# Altium PCB PCB.PcbDoc (part 2 of 2)
Units mm, origin at the board's own origin, x right, y up, seen from the top; angles counter-clockwise.
Board outline 51.3 x 20.05 mm, 4 copper layers (Top Layer, Power Layer, GND Layer, Bottom Layer), stack 1.536 mm thick; 81 components, 59 nets, 315 pads, 114 vias.
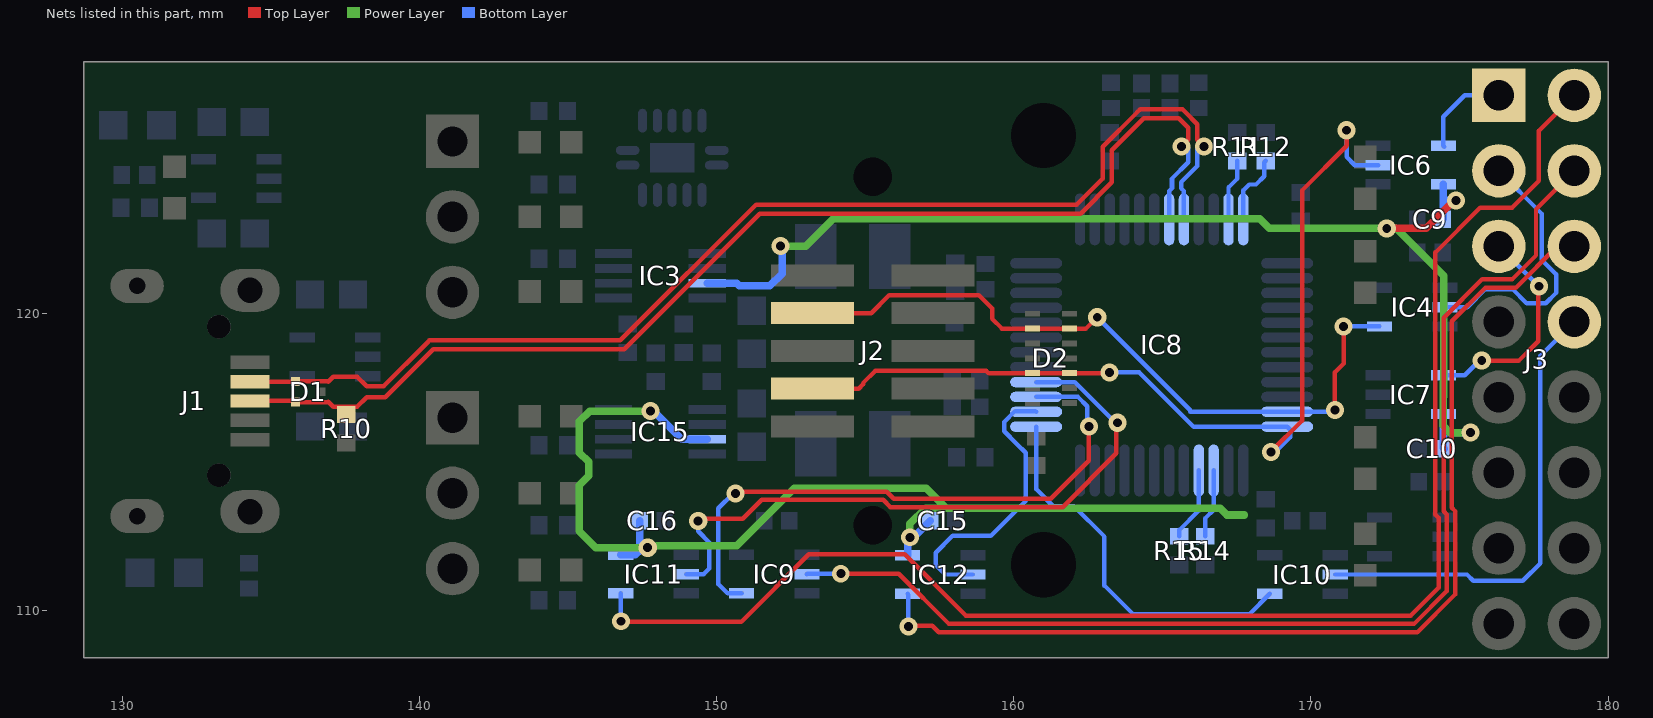
[diagram p4: the nets of this part, all layers, seen from the top]

## Via types
v1: diameter 0.61, hole 0.3, Top Layer to Bottom Layer, tented both sides, 100 vias
v2: diameter 0.61, hole 0.3, Top Layer to Bottom Layer, 11 vias
v3: diameter 0.6, hole 0.3, Top Layer to Bottom Layer, tented both sides, 3 vias

## Nets (pads, with @x,y where several pads share a name; then routed paths per layer and width w, separated by ;. In a path a pad name is that pad's centre, name@x,y a point inside that pad or via, vN(x,y) a via of type N, cw(c..) or ccw(c..) an arc to the next point about the centre after c; other vN are vias at no path point) (continued)
UART_1_RTS_T: IC7.4 J3.5 | length 7.3
  Top Layer w0.15: v1(175.75,118.425) 177,118.425 177.65,119.075 177.65,120.9 v1(177.675,120.925)
  Bottom Layer w0.15: IC7.4@174.458,117.925 175.175,117.925 v1@175.6,118.35 ; J3.5@176.325,122.27 177.67,120.925 v1(177.675,120.925)
UART_1_RXD: D2.9 IC4.4 IC8.23 J2.8 | length 24.4
  Top Layer w0.15: J2.8@153.218,120.02 155.195,120.02 155.8,120.625 158.825,120.625 159.273,120.177 159.273,119.825 159.598,119.5 D2.9@160.625,119.5 162.427,119.5 v1(162.808,119.881) ; v1(170.808,116.756) 170.808,116.683 170.8,116.675 170.8,118.025 171.1,118.325 v1(171.1,119.575)
  Bottom Layer w0.15: v1(162.808,119.881) 165.942,116.747 165.942,116.7 IC8.23@169.2,116.7 170.75,116.7 170.775,116.675 170.8,116.675 170.808,116.683 v1(170.808,116.756) ; v1(171.1,119.575) 172.304,119.575 IC4.4@172.308,119.571
UART_1_RXD_T: IC4.2 J3.3 | length 9.2
  Bottom Layer w0.15: IC4.2@174.508,120.221 175.258,120.221 175.869,120.832 176.781,120.832 177.257,120.357 177.907,120.357 178.25,120.7 178.25,121.327 177.763,121.814 177.763,123.372 J3.3@176.325,124.81
UART_1_RXLED: IC8.12 R12.1 | length 2.4
  Bottom Layer w0.15: IC8.12@167.725,123.175 167.725,124.15 167.925,124.35 168.15,124.35 168.425,124.625 168.425,125.095 R12.1@168.475,125.145
UART_1_TXD: D2.12 IC6.2 IC8.24 J2.4 | length 32.2
  Top Layer w0.15: J2.4@153.218,117.48 154.78,117.48 154.926,117.626 154.926,117.666 155.335,118.075 159.075,118.075 159.15,118 D2.12@160.625,118 163.2,118 v1(163.225,118.025) ; v1(168.65,115.35) 169.7,116.4 169.7,124.15 171.2,125.65 v1(171.2,126.175)
  Bottom Layer w0.15: v1(163.225,118.025) 164.225,118.025 166.05,116.2 IC8.24@169.2,116.2 169.3,116.1 169.3,115.85 168.8,115.35 v1(168.65,115.35) ; v1(171.2,126.175) 171.2,125.278 171.475,125.003 IC6.2@172.258,125.003
UART_1_TXD_T: IC6.4 J3.1 | length 3.2
  Bottom Layer w0.15: IC6.4@174.486,125.625 IC6.4@174.458,125.653 174.458,126.633 175.175,127.35 J3.1@176.325,127.35
UART_1_TXLED: IC8.11 R11.1 | length 2.1
  Bottom Layer w0.15: IC8.11@167.225,123.175 167.225,124.25 167.525,124.55 R11.1@167.525,125.145
UART_2_CTS: IC8.37 IC10.4 | length 13
  Bottom Layer w0.15: IC8.37@160.75,116.2 160.75,114.1 161.325,113.525 162.025,113.525 163.05,112.5 163.05,110.85 164.007,109.893 167.935,109.893 IC10.4@168.615,110.573
UART_2_CTS_T: IC10.2 J3.8 | length 15.8
  Bottom Layer w0.15: IC10.2@170.815,111.223 175.252,111.223 175.467,111.008 177.133,111.008 177.725,111.6 177.725,118.59 J3.8@178.865,119.73
UART_2_RTS: IC8.38 IC12.2 | length 9.8
  Bottom Layer w0.15: IC12.2@158.623,111.223 157.685,111.223 157.368,111.54 157.368,111.96 157.936,112.528 159.228,112.528 160.4,113.7 160.4,115.317 160.085,115.632 159.673,116.044 159.673,116.356 160.042,116.725 160.725,116.725 IC8.38@160.75,116.7
UART_2_RTS_T: IC12.4 J3.6 | length 34.6
  Top Layer w0.15: v1@156.35,109.425 v1@156.375,109.4 ; v1(156.45,109.475) 156.475,109.5 157.25,109.5 157.467,109.283 173.583,109.283 174.85,110.55 174.85,113.358 174.743,113.465 174.743,119.743 175.875,120.875 176.9,120.875 178.295,122.27 J3.6@178.865,122.27
  Bottom Layer w0.15: IC12.4@156.423,110.573 156.45,110.546 v1(156.45,109.475)
UART_2_RXD: IC8.39 IC9.4 | length 20.5
  Top Layer w0.15: v1(150.625,113.95) 150.687,114.012 155.718,114.012 155.961,113.768 161.243,113.768 162.525,115.05 v1(162.525,116.2)
  Bottom Layer w0.15: v1(150.625,113.95) 150.55,113.95 150.05,113.45 150.05,110.9 150.363,110.587 IC9.4@150.835,110.587 ; IC8.39@160.75,117.2 162.158,117.2 162.475,116.883 162.475,116.25 v1(162.525,116.2)
UART_2_RXD_T: IC9.2 J3.4 | length 39.3
  Top Layer w0.15: v3(154.175,111.25) 156.125,111.25 157.815,109.56 173.469,109.56 174.573,110.664 174.573,113.243 174.466,113.35 174.466,119.866 175.768,121.168 176.781,121.168 177.575,121.962 177.575,123.52 J3.4@178.865,124.81
  Bottom Layer w0.15: IC9.2@153.035,111.237 153.048,111.25 v3(154.175,111.25)
UART_2_RXLED: IC8.28 R15.1 | length 2.5
  Bottom Layer w0.15: R15.1@165.573,112.51 165.573,112.723 166.225,113.375 IC8.28@166.225,114.725
UART_2_TXD: IC8.40 IC11.2 | length 22.1
  Top Layer w0.15: v1(149.375,113.025) 149.45,113.025 149.525,113.1 150.875,113.1 151.51,113.735 155.603,113.735 155.846,113.491 161.641,113.491 163.45,115.3 v1@163.45,116.208
  Bottom Layer w0.15: IC11.2@148.971,111.237 149.562,111.237 149.75,111.425 149.75,112.3 149.375,112.675 v1(149.375,113.025) ; IC8.40@160.75,117.7 162.05,117.7 163.425,116.325 v1@163.425,116.2
  other v1: 163.483,116.331
UART_2_TXD_T: IC11.4 J3.2 | length 49.9
  Top Layer w0.15: v3@146.725,109.625 150.825,109.625 153.1,111.9 156.325,111.9 158.388,109.837 173.354,109.837 174.296,110.779 174.296,113.129 174.189,113.236 174.189,122.064 175.7,123.575 176.775,123.575 177.675,124.475 177.675,126.16 J3.2@178.865,127.35
  Bottom Layer w0.15: IC11.4@146.771,110.587 146.775,110.583 v3(146.775,109.65)
UART_2_TXLED: IC8.27 R14.1 | length 2.3
  Bottom Layer w0.15: R14.1@166.448,112.51 166.448,113.123 166.725,113.4 IC8.27@166.725,114.725
USB_D_N: D1.1 IC8.8 J1.2 | length 40.6
  Top Layer w0.15: J1.2@134.29,117.714 135.814,117.714 D1.1@135.825,117.725 136.439,117.725 136.441,117.727 136.909,117.727 136.922,117.714 137.09,117.882 137.893,117.882 138.215,117.56
  Top Layer w0.152: 138.215,117.56 138.785,117.56 140.25,119.025 140.33,119.105 146.755,119.105 151.325,123.675 162.12,123.675 162.995,124.55 162.995,125.626 164.159,126.791 164.249,126.88 165.676,126.88 165.766,126.791 166.175,126.381 166.175,125.854 v2(166.404,125.625)
  Bottom Layer w0.152: IC8.8@165.725,123.175 165.725,124.131 165.627,124.229 165.627,124.425 166.175,124.973 166.175,125.575 166.225,125.625 v2(166.404,125.625)
USB_D_P: D1.2 IC8.7 J1.3 R10.1 | length 40.1
  Top Layer w0.15: J1.3@134.29,117.064 135.786,117.064 D1.2@135.825,117.025 136.439,117.025 136.441,117.023 136.909,117.023 136.922,117.036 137.09,116.868 137.893,116.868 138.215,117.19
  Top Layer w0.152: 138.215,117.19 138.846,117.19 140.456,118.8 146.881,118.8 151.451,123.37 162.246,123.37 163.3,124.424 163.3,125.5 164.375,126.575 165.55,126.575 165.87,126.255 165.87,125.854 v2(165.641,125.625)
  Bottom Layer w0.152: IC8.7@165.225,123.175 165.225,124.131 165.323,124.229 165.323,124.551 165.87,125.099 165.87,125.575 165.82,125.625 v2(165.641,125.625)
VCCIOA: C9.2 C10.2 IC3.7 IC6.5 IC7.5 | length 40.3
  Top Layer w0.254: v2(172.55,122.875) 173.875,122.875 v1@174.825,123.825
  Power Layer w0.254: v1(152.15,122.275) 153,122.275 153.925,123.2 168.275,123.2 168.6,122.875 169.025,122.875 v2(172.55,122.875) 172.875,122.875 174.475,121.275 174.475,117.725 ; 174.475,117.2 174.475,117.725 ; v1(175.375,116) 174.675,116 174.45,116.225 174.45,117.7 174.475,117.725
  Bottom Layer w0.254: IC3.7@149.679,121.025 150.666,121.025 150.75,120.941 151.791,120.941 152.2,121.35 152.2,122.225 v1(152.15,122.275) ; C9.2@174.433,123.178 174.458,123.203 174.458,123.75 ; IC7.5@174.458,116.625 174.458,116 ; IC6.5@174.458,124.353 174.458,123.75 ; C10.2@174.483,115.458 174.458,115.483 174.458,116 ; v1(174.884,123.806) 174.906,123.806 174.925,123.825 174.533,123.825 174.458,123.75 ; v1(175.375,116) 174.458,116
VCCIOB: C15.2 C16.2 IC11.5 IC12.5 IC15.7 | length 37.7
  Power Layer w0.254: v1(147.775,116.725) 145.725,116.725 145.375,116.375 145.375,115.328 145.691,115.012 145.691,114.549 145.375,114.233 145.375,112.675 145.925,112.125 v1(147.675,112.125) 147.735,112.185 150.675,112.185 152.615,114.125 157.05,114.125 157.721,113.454 ; v3(156.5,112.475) 156.5,112.925 157.029,113.454 157.721,113.454 ; 167.75,113.225 167.175,113.225 166.946,113.454 157.721,113.454
  Bottom Layer w0.254: IC11.5@146.771,111.887 147.262,111.887 147.403,112.028 C16.2@147.403,113.03 ; v1(147.775,116.725) 147.875,116.725 148.825,115.775 IC15.7@149.679,115.775 ; IC12.5@156.423,111.873 156.423,112.271 C15.2@157.182,113.03
pads on no net: IC1.4 IC2.4 IC8.1 IC8.13 IC8.15 IC8.16 IC8.17 IC8.20 IC8.29 IC8.30 IC8.32 IC8.33 IC8.35 IC8.36 IC8.41 IC8.48 IC13.8 IC13.11 J1. J1.4 J2.0 J2.7 Y1.2 Y1.4

## Polygon pours and split planes (outlines as drawn)
GND on GND Layer "GND" (solid, pour order 27): 128.7,128.475 180,128.475 180,108.425 128.7,108.425
VCCIOA on Power Layer "VCCIOA" (solid, pour order 28): 175.68,115.689 173.85,115.675 173.813,118.2 174.05,118.425 174.216,118.635 174.216,119.425 174.194,120.886 173.712,121.352 173.686,121.382 150.582,121.382 150.525,121.449 150.525,122.182 151.571,123.411 172.893,123.411 175.686,120.128 175.686,115.697
VCCIOB on Power Layer "VCCIOB" (solid, pour order 31): 168.1,114.125 168.275,113.95 168.275,113.65 168.275,112.95 168.1,112.775 167.925,112.6 157.575,112.6 157.075,112.1 156.875,111.9 145.9,111.9 145.675,111.9 145.2,112.375 145.15,112.425 140.375,112.425 140.1,112.425 139.925,112.6 139.725,112.8 139.725,116.725 139.725,116.95 140.075,117.3 140.175,117.4 148.175,117.4 148.214,117.4 148.275,117.339 148.275,116.475 147.825,116.025 146.125,116.025 145.975,115.875 145.94,115.84 145.94,114.425 145.94,114.378 145.634,114.072 145.634,113.755 145.634,113.691 145.85,113.475 145.893,113.432 149.193,113.432 149.207,113.432 150.107,114.332 150.15,114.375 159.725,114.375 167.85,114.375 167.95,114.275 168.25,113.975
1V8 on Power Layer "1V8" (solid, pour order 37): 179.975,113.4 179.95,113.425 176.65,113.425 172.734,109.509 158.591,109.509 157.7,110.4 155.625,110.4 155.475,110.325 151.2,110.325 150.8,110.725 150.775,110.7 146.084,110.7 144.784,109.4 134.666,109.4 134.666,109.415 132.65,111.431 132.65,115.05 132.8,115.05 135.803,118.053 135.803,122.278 138.475,124.95 138.475,125.25 138.15,125.575 137.425,125.575 134.75,122.9 134.75,118.7 131.225,115.175 131.225,108.425 180,108.425 179.975,108.45
3V3_FT on Power Layer "3V3_FT" (solid, pour order 34): 179.99,116.05 176.3,116.05 175.457,116.893 175.457,116.907 173.957,116.907 173.95,116.9 173.95,118.2 173.975,118.2 174.5,118.725 174.5,120.675 173.475,121.7 172.175,121.7 171.675,121.175 171.675,120.575 172.15,120.1 173.525,120.1 173.525,119.475 172.3,118.25 172.3,116.725 170.9,115.325 169.596,115.325 168.275,114.004 168.275,113.041 167.918,112.684 157.659,112.684 156.875,111.9 145.675,111.9 144.775,112.8 139.425,112.8 139.3,112.675 139.3,111.525 138.525,110.75 135.225,110.75 135.225,111.575 135.2,111.6 136.8,113.2 136.8,121.825 138.725,123.75 141.11,123.75 142.2,122.66 142.45,122.91 143.31,122.91 143.55,123.15 143.55,124.1 142.575,125.075 138.475,125.075 138.475,124.95 135.775,122.25 135.8,118.225 135.625,118.025 132.65,115.05 132.65,111.375 134.625,109.4 144.825,109.4 146.15,110.725 150.8,110.725 151.225,110.325 157.775,110.325 158.65,109.45 172.675,109.45 176.625,113.4 179.975,113.4 179.975,116.035
5V_USB on Power Layer "5V_USB" (solid, pour order 40): 179.975,128.5 179.975,115.913 179.838,116.05 176.3,116.05 176.3,116.064 175.433,116.93 175.433,120.667 172.689,123.411 151.561,123.411 150.525,122.375 150.662,122.238 150.662,121.7 173.475,121.7 173.5,121.675 173.475,121.65 173.475,119.425 172.3,118.25 172.3,116.725 170.9,115.325 169.596,115.325 168.496,114.225 159.375,114.225 158.75,114.35 150.175,114.35 150.15,114.375 149.207,113.432 145.893,113.432 145.634,113.691 145.634,114.072 145.975,114.413 145.975,115.875 146.125,116.025 147.825,116.025 148.275,116.475 148.275,117.263 148.138,117.4 147.875,117.137 139.912,117.137 139.535,116.76 139.535,111.416 138.642,110.523 138.584,110.581 134.818,110.581 134.818,111.218 136.8,113.2 136.8,121.819 138.725,123.744 138.725,123.75 141.385,123.75 142.11,123.025 142.198,123.112 143.293,123.112 143.55,123.369 143.55,124.1 142.575,125.075 138.528,125.075 138.528,125.197 138.15,125.575 137.425,125.575 134.75,122.9 134.75,118.7 131.225,115.175 131.225,108.45 128.725,108.45 128.7,108.425 128.7,128.475 180,128.475 179.99,128.465 179.99,116.05
no net on Top Layer "AntmicroLogo" (solid, pour order 29): 319 vertices, not listed, extent 162.496,110.95 167.08,114.952
no net on Top Layer "AntmicroLogo" (solid, pour order 30): 205 vertices, not listed, extent 153.576,105.332 165.727,113.682
no net on Top Layer "AntmicroLogo" (solid, pour order 42): 165.273,124.187 165.394,124.255 165.493,124.342 165.567,124.451 165.613,124.581 165.629,124.732 165.613,124.884 165.567,125.013 165.493,125.122 165.394,125.21 165.273,125.278 165.131,125.326 164.973,125.354 164.799,125.364 164.627,125.354 164.469,125.326 164.328,125.278 164.207,125.21 164.108,125.122 164.035,125.014 163.989,124.884 163.973,124.732 163.989,124.581 164.035,124.451 164.108,124.342 164.207,124.255 164.328,124.187 164.469,124.139 164.627,124.111 164.799,124.101 164.973,124.111 165.131,124.139
no net on Top Layer "AntmicroLogo" (solid, pour order 41): 165.599,123.38 164.085,123.38 164.003,123.618 163.973,123.925 163.976,124.011 163.981,124.064 164.177,124.005 164.157,123.928 164.15,123.842 164.16,123.736 164.192,123.64 165.599,123.64
no net on Top Layer "AntmicroLogo" (solid, pour order 39): 165.277,122.245 165.135,122.193 164.975,122.161 164.799,122.15 164.623,122.161 164.464,122.193 164.323,122.245 164.203,122.317 164.105,122.406 164.033,122.512 163.988,122.633 163.973,122.77 164,122.972 164.076,123.128 164.231,123.066 164.198,123.014 164.173,122.952 164.156,122.885 164.15,122.814 164.199,122.644 164.334,122.52 164.538,122.443 164.793,122.417 165.047,122.444 165.252,122.521 165.389,122.646 165.439,122.814 165.434,122.884 165.419,122.951 165.394,123.011 165.362,123.063 165.525,123.128 165.602,122.972 165.629,122.77 165.613,122.632 165.568,122.51 165.495,122.404 165.397,122.316
no net on Top Layer "AntmicroLogo" (solid, pour order 38): 165.599,121.647 165.599,121.908 164.002,121.908 164.002,121.647
no net on Top Layer "AntmicroLogo" (solid, pour order 36): 165.601,119.502 ccw(c165.599,119.502) 165.599,119.504 164.194,119.504 164.153,119.639 164.141,119.801 164.146,119.883 164.162,119.953 164.189,120.01 164.224,120.057 164.268,120.092 164.319,120.117 164.378,120.131 164.444,120.136 165.599,120.136 ccw(c165.599,120.138) 165.601,120.138 165.601,120.396 ccw(c165.599,120.396) 165.599,120.399 164.291,120.399 164.229,120.461 164.182,120.533 164.151,120.615 164.141,120.707 164.147,120.788 164.165,120.857 164.195,120.913 164.235,120.958 164.284,120.992 164.343,121.015 164.41,121.029 164.485,121.034 165.599,121.034 ccw(c165.599,121.036) 165.602,121.036 165.602,121.294 ccw(c165.599,121.294) 165.599,121.296 164.488,121.296 ccw(c164.488,121.294) 164.488,121.296 164.279,121.263 ccw(c164.279,121.261) 164.278,121.263 ccw(c164.279,121.261) 164.278,121.263 164.115,121.161 ccw(c164.116,121.159) 164.115,121.161 ccw(c164.116,121.159) 164.114,121.161 ccw(c164.116,121.159) 164.114,121.161 164.008,120.985 cw(c164.01,120.984) 164.008,120.985 ccw(c164.01,120.984) 164.008,120.985 163.97,120.732 ccw(c163.973,120.731) 163.97,120.731 ccw(c163.973,120.731) 163.97,120.731 163.983,120.594 cw(c163.986,120.594) 163.983,120.594 ccw(c163.986,120.594) 163.983,120.594 164.02,120.47 ccw(c164.023,120.47) 164.02,120.469 164.079,120.361 ccw(c164.081,120.362) 164.08,120.36 ccw(c164.081,120.362) 164.08,120.36 164.156,120.272 164.077,120.188 cw(c164.079,120.187) 164.077,120.188 ccw(c164.079,120.187) 164.077,120.188 ccw(c164.079,120.187) 164.077,120.188 cw(c164.079,120.187) 164.077,120.188 164.018,120.084 ccw(c164.021,120.083) 164.018,120.084 ccw(c164.021,120.083) 164.018,120.084 163.982,119.954 ccw(c163.985,119.954) 163.982,119.954 ccw(c163.985,119.954) 163.982,119.954 163.97,119.792 cw(c163.973,119.792) 163.97,119.792 ccw(c163.973,119.792) 163.97,119.792 164.001,119.494 ccw(c164.003,119.495) 164.001,119.494 164.083,119.243 ccw(c164.085,119.244) 164.085,119.241 165.599,119.241 ccw(c165.599,119.244) 165.601,119.244 165.601,119.502 cw(c160.78,105.182)
no net on Top Layer "AntmicroLogo" (solid, pour order 35): 165.511,118.567 165.385,118.489 165.211,118.462 164.165,118.462 164.165,118.278 164.002,118.278 164.002,118.462 163.635,118.462 163.555,118.723 164.002,118.723 164.002,119.001 164.165,119.001 164.165,118.723 165.211,118.723 165.304,118.735 165.374,118.773 165.418,118.835 165.433,118.921 165.421,119.001 165.587,119.001 165.607,118.93 165.614,118.844 165.588,118.688
no net on Top Layer "AntmicroLogo" (solid, pour order 33): 165.599,117.202 164.192,117.202 164.152,117.333 164.138,117.484 164.161,117.65 164.228,117.761 164.34,117.823 164.497,117.843 165.599,117.843 165.599,118.103 164.497,118.103 164.273,118.067 164.108,117.955 164.007,117.762 163.973,117.484 164.003,117.194 164.085,116.942 165.599,116.942
no net on Top Layer "AntmicroLogo" (solid, pour order 32): 165.355,115.495 165.146,115.454 165.012,115.471 164.899,115.521 164.805,115.601 164.728,115.708 164.667,115.839 164.62,115.991 164.586,116.162 164.562,116.348 164.464,116.348 164.388,116.343 164.322,116.326 164.268,116.299 164.224,116.261 164.19,116.213 164.166,116.155 164.152,116.086 164.148,116.008 164.176,115.796 164.248,115.608 164.088,115.545 164.005,115.774 163.973,116.031 164.004,116.265 164.099,116.441 164.26,116.553 164.491,116.591 165.516,116.591 165.598,116.358 165.629,116.061 165.598,115.805 165.506,115.614
no net on Top Solder "AntmicroLogo" (solid, pour order 9): 319 vertices, not listed, extent 162.496,110.95 167.08,114.952
no net on Top Solder "AntmicroLogo" (solid, pour order 10): 205 vertices, not listed, extent 153.576,105.332 165.727,113.682
no net on Top Solder "AntmicroLogo" (solid, pour order 23): 165.273,124.187 165.394,124.255 165.493,124.342 165.567,124.451 165.613,124.581 165.629,124.732 165.613,124.884 165.567,125.013 165.493,125.122 165.394,125.21 165.273,125.278 165.131,125.326 164.973,125.354 164.799,125.364 164.627,125.354 164.469,125.326 164.328,125.278 164.207,125.21 164.108,125.122 164.035,125.014 163.989,124.884 163.973,124.732 163.989,124.581 164.035,124.451 164.108,124.342 164.207,124.255 164.328,124.187 164.469,124.139 164.627,124.111 164.799,124.101 164.973,124.111 165.131,124.139
no net on Top Solder "AntmicroLogo" (solid, pour order 18): 165.599,123.38 164.085,123.38 164.003,123.618 163.973,123.925 163.976,124.011 163.981,124.064 164.177,124.005 164.157,123.928 164.15,123.842 164.16,123.736 164.192,123.64 165.599,123.64
no net on Top Solder "AntmicroLogo" (solid, pour order 16): 165.277,122.245 165.135,122.193 164.975,122.161 164.799,122.15 164.623,122.161 164.464,122.193 164.323,122.245 164.203,122.317 164.105,122.406 164.033,122.512 163.988,122.633 163.973,122.77 164,122.972 164.076,123.128 164.231,123.066 164.198,123.014 164.173,122.952 164.156,122.885 164.15,122.814 164.199,122.644 164.334,122.52 164.538,122.443 164.793,122.417 165.047,122.444 165.252,122.521 165.389,122.646 165.439,122.814 165.434,122.884 165.419,122.951 165.394,123.011 165.362,123.063 165.525,123.128 165.602,122.972 165.629,122.77 165.613,122.632 165.568,122.51 165.495,122.404 165.397,122.316
no net on Top Solder "AntmicroLogo" (solid, pour order 14): 165.599,121.647 165.599,121.908 164.002,121.908 164.002,121.647
no net on Top Solder "AntmicroLogo" (solid, pour order 14): 165.601,119.502 ccw(c165.599,119.502) 165.599,119.504 164.194,119.504 164.153,119.639 164.141,119.801 164.146,119.883 164.162,119.953 164.189,120.01 164.224,120.057 164.268,120.092 164.319,120.117 164.378,120.131 164.444,120.136 165.599,120.136 ccw(c165.599,120.138) 165.601,120.138 165.601,120.396 ccw(c165.599,120.396) 165.599,120.399 164.291,120.399 164.229,120.461 164.182,120.533 164.151,120.615 164.141,120.707 164.147,120.788 164.165,120.857 164.195,120.913 164.235,120.958 164.284,120.992 164.343,121.015 164.41,121.029 164.485,121.034 165.599,121.034 ccw(c165.599,121.036) 165.602,121.036 165.602,121.294 ccw(c165.599,121.294) 165.599,121.296 164.488,121.296 ccw(c164.488,121.294) 164.488,121.296 164.279,121.263 ccw(c164.279,121.261) 164.278,121.263 ccw(c164.279,121.261) 164.278,121.263 164.115,121.161 ccw(c164.116,121.159) 164.115,121.161 ccw(c164.116,121.159) 164.114,121.161 ccw(c164.116,121.159) 164.114,121.161 164.008,120.985 cw(c164.01,120.984) 164.008,120.985 ccw(c164.01,120.984) 164.008,120.985 163.97,120.732 ccw(c163.973,120.731) 163.97,120.731 ccw(c163.973,120.731) 163.97,120.731 163.983,120.594 cw(c163.986,120.594) 163.983,120.594 ccw(c163.986,120.594) 163.983,120.594 164.02,120.47 ccw(c164.023,120.47) 164.02,120.469 164.079,120.361 ccw(c164.081,120.362) 164.08,120.36 ccw(c164.081,120.362) 164.08,120.36 164.156,120.272 164.077,120.188 cw(c164.079,120.187) 164.077,120.188 ccw(c164.079,120.187) 164.077,120.188 ccw(c164.079,120.187) 164.077,120.188 cw(c164.079,120.187) 164.077,120.188 164.018,120.084 ccw(c164.021,120.083) 164.018,120.084 ccw(c164.021,120.083) 164.018,120.084 163.982,119.954 ccw(c163.985,119.954) 163.982,119.954 ccw(c163.985,119.954) 163.982,119.954 163.97,119.792 cw(c163.973,119.792) 163.97,119.792 ccw(c163.973,119.792) 163.97,119.792 164.001,119.494 ccw(c164.003,119.495) 164.001,119.494 164.083,119.243 ccw(c164.085,119.244) 164.085,119.241 165.599,119.241 ccw(c165.599,119.244) 165.601,119.244 165.601,119.502 cw(c160.78,105.182)
no net on Top Solder "AntmicroLogo" (solid, pour order 12): 165.511,118.567 165.385,118.489 165.211,118.462 164.165,118.462 164.165,118.278 164.002,118.278 164.002,118.462 163.635,118.462 163.555,118.723 164.002,118.723 164.002,119.001 164.165,119.001 164.165,118.723 165.211,118.723 165.304,118.735 165.374,118.773 165.418,118.835 165.433,118.921 165.421,119.001 165.587,119.001 165.607,118.93 165.614,118.844 165.588,118.688
no net on Top Solder "AntmicroLogo" (solid, pour order 12): 165.599,117.202 164.192,117.202 164.152,117.333 164.138,117.484 164.161,117.65 164.228,117.761 164.34,117.823 164.497,117.843 165.599,117.843 165.599,118.103 164.497,118.103 164.273,118.067 164.108,117.955 164.007,117.762 163.973,117.484 164.003,117.194 164.085,116.942 165.599,116.942
no net on Top Solder "AntmicroLogo" (solid, pour order 10): 165.355,115.495 165.146,115.454 165.012,115.471 164.899,115.521 164.805,115.601 164.728,115.708 164.667,115.839 164.62,115.991 164.586,116.162 164.562,116.348 164.464,116.348 164.388,116.343 164.322,116.326 164.268,116.299 164.224,116.261 164.19,116.213 164.166,116.155 164.152,116.086 164.148,116.008 164.176,115.796 164.248,115.608 164.088,115.545 164.005,115.774 163.973,116.031 164.004,116.265 164.099,116.441 164.26,116.553 164.491,116.591 165.516,116.591 165.598,116.358 165.629,116.061 165.598,115.805 165.506,115.614

## Other copper
Top Layer:
  pour cut-out: 165.284,115.727 165.14,115.702 164.959,115.746 164.831,115.873 164.748,116.076 164.698,116.348 165.424,116.348 165.446,116.295 165.463,116.231 165.474,116.16 165.478,116.085 165.455,115.92 165.39,115.8
  pour cut-out: 165.159,124.406 165.047,124.381 164.924,124.366 164.793,124.362 164.663,124.366 164.541,124.381 164.43,124.406 164.333,124.443 164.252,124.493 164.191,124.557 164.152,124.637 164.138,124.732 164.152,124.828 164.191,124.908 164.252,124.972 164.333,125.022 164.43,125.059 164.541,125.084 164.663,125.098 164.793,125.103 164.924,125.098 165.047,125.084 165.159,125.059 165.257,125.022 165.339,124.972 165.401,124.908 165.44,124.828 165.454,124.732 165.44,124.637 165.401,124.557 165.339,124.493 165.257,124.443
  pour cut-out: 164.851,113.55 cw(c164.788,113.55) 164.788,113.487 cw(c164.788,113.55) 164.724,113.55 cw(c164.788,113.55) 164.788,113.614 cw(c164.788,113.55) 164.851,113.55 cw(c154.828,105.994)
  pour cut-out: 164.321,113.472 cw(c164.258,113.472) 164.258,113.408 cw(c164.258,113.472) 164.194,113.472 cw(c164.258,113.472) 164.258,113.535 cw(c164.258,113.472) 164.321,113.472 cw(c154.75,106.524)
  pour cut-out: 164.158,112.951 cw(c164.034,112.951) 164.034,112.827 cw(c164.034,112.951) 163.91,112.951 cw(c164.034,112.951) 164.034,113.075 cw(c164.034,112.951) 164.158,112.951 cw(c154.229,106.748)
  pour cut-out: 164.321,112.43 cw(c164.258,112.43) 164.258,112.367 cw(c164.258,112.43) 164.194,112.43 cw(c164.258,112.43) 164.258,112.494 cw(c164.258,112.43) 164.321,112.43 cw(c153.708,106.524)
  pour cut-out: 164.851,112.351 cw(c164.788,112.351) 164.788,112.288 cw(c164.788,112.351) 164.724,112.351 cw(c164.788,112.351) 164.788,112.415 cw(c164.788,112.351) 164.851,112.351 cw(c153.629,105.994)
  pour cut-out: 165.381,112.43 cw(c165.318,112.43) 165.318,112.367 cw(c165.318,112.43) 165.255,112.43 cw(c165.318,112.43) 165.318,112.494 cw(c165.318,112.43) 165.381,112.43 cw(c153.708,105.463)
  pour cut-out: 165.666,112.951 cw(c165.542,112.951) 165.542,112.827 cw(c165.542,112.951) 165.418,112.951 cw(c165.542,112.951) 165.542,113.075 cw(c165.542,112.951) 165.666,112.951 cw(c154.229,105.239)
  pour cut-out: 165.318,113.408 ccw(c165.318,113.472) 165.381,113.472 ccw(c165.318,113.472) 165.318,113.535 ccw(c165.318,113.472) 165.255,113.472 ccw(c165.318,113.472) 165.318,113.408 cw(c154.75,105.463)
  text ".AM_Title" at 166.9,115.5 h1.52 r90
  text "Rev. 1.1    03/2019" at 168,115.5 h1.52 r90

## Silkscreen, mask and mechanical layers (free items; w line width, h text height)
Top Overlay:
  lines w0.15: 172.375,126.3 172.375,127.15 ; 174.915,126.275 174.915,127.125
  text "A" at 172.11,127.425 h0.76
  text "B" at 174.65,127.4 h0.76
  text "JTAG" at 153.975,126.475 h0.76
  text "3V3" at 139.325,125.1 h0.76 r90
  text "TX" at 173.762,124.5 h0.76
  text "RX" at 173.762,122.5 h0.76
  text "5V0" at 139.375,122.225 h0.76 r90
  text "CH A" at 138.25,121.925 h1.52 r90
  text "RTS" at 173,120.5 h0.76
  text "1V8" at 139.375,119.55 h0.76 r90
  text "CTS" at 173,118.5 h0.76
  text "5V0" at 173,116.5 h0.76
  text "3V3" at 139.35,115.725 h0.76 r90
  text "3V3" at 173,114.5 h0.76
  text "5V0" at 139.4,112.925 h0.76 r90
  text "1V8" at 173,112.5 h0.76
  text "GND" at 173,110.5 h0.76
  text "1V8" at 139.4,110.125 h0.76 r90
  text "CH B" at 138.25,109.4 h1.52 r90
Bottom Overlay:
  lines w0.178: 154.365,123.522 154.513,123.67 154.513,125.412 154.75,125.65 154.775,125.65 ; 159.375,117.525 159.375,116.35 159.918,115.807 161.49,115.807 ; 162.8,127.875 162,127.875 158.025,127.875 158.025,125.975 157.7,125.65 154.775,125.65 ; 154.775,125.65 154.775,125.65
Top Solder:
  pour cut-out: 165.284,115.727 165.14,115.702 164.959,115.746 164.831,115.873 164.748,116.076 164.698,116.348 165.424,116.348 165.446,116.295 165.463,116.231 165.474,116.16 165.478,116.085 165.455,115.92 165.39,115.8
  pour cut-out: 165.159,124.406 165.047,124.381 164.924,124.366 164.793,124.362 164.663,124.366 164.541,124.381 164.43,124.406 164.333,124.443 164.252,124.493 164.191,124.557 164.152,124.637 164.138,124.732 164.152,124.828 164.191,124.908 164.252,124.972 164.333,125.022 164.43,125.059 164.541,125.084 164.663,125.098 164.793,125.103 164.924,125.098 165.047,125.084 165.159,125.059 165.257,125.022 165.339,124.972 165.401,124.908 165.44,124.828 165.454,124.732 165.44,124.637 165.401,124.557 165.339,124.493 165.257,124.443
  pour cut-out: 164.851,113.55 cw(c164.788,113.55) 164.788,113.487 cw(c164.788,113.55) 164.724,113.55 cw(c164.788,113.55) 164.788,113.614 cw(c164.788,113.55) 164.851,113.55 cw(c154.828,105.994)
  pour cut-out: 164.321,113.472 cw(c164.258,113.472) 164.258,113.408 cw(c164.258,113.472) 164.194,113.472 cw(c164.258,113.472) 164.258,113.535 cw(c164.258,113.472) 164.321,113.472 cw(c154.75,106.524)
  pour cut-out: 164.158,112.951 cw(c164.034,112.951) 164.034,112.827 cw(c164.034,112.951) 163.91,112.951 cw(c164.034,112.951) 164.034,113.075 cw(c164.034,112.951) 164.158,112.951 cw(c154.229,106.748)
  pour cut-out: 164.321,112.43 cw(c164.258,112.43) 164.258,112.367 cw(c164.258,112.43) 164.194,112.43 cw(c164.258,112.43) 164.258,112.494 cw(c164.258,112.43) 164.321,112.43 cw(c153.708,106.524)
  pour cut-out: 164.851,112.351 cw(c164.788,112.351) 164.788,112.288 cw(c164.788,112.351) 164.724,112.351 cw(c164.788,112.351) 164.788,112.415 cw(c164.788,112.351) 164.851,112.351 cw(c153.629,105.994)
  pour cut-out: 165.381,112.43 cw(c165.318,112.43) 165.318,112.367 cw(c165.318,112.43) 165.255,112.43 cw(c165.318,112.43) 165.318,112.494 cw(c165.318,112.43) 165.381,112.43 cw(c153.708,105.463)
  pour cut-out: 165.666,112.951 cw(c165.542,112.951) 165.542,112.827 cw(c165.542,112.951) 165.418,112.951 cw(c165.542,112.951) 165.542,113.075 cw(c165.542,112.951) 165.666,112.951 cw(c154.229,105.239)
  pour cut-out: 165.318,113.408 ccw(c165.318,113.472) 165.381,113.472 ccw(c165.318,113.472) 165.318,113.535 ccw(c165.318,113.472) 165.255,113.472 ccw(c165.318,113.472) 165.318,113.408 cw(c154.75,105.463)
  text ".AM_Title" at 166.9,115.5 h1.52 r90
  text "Rev. 1.1    03/2019" at 168,115.5 h1.52 r90
PCB Fab Notes:
  drawing of 347 lines, arcs and shapes, not listed
  text "Layer" at 191.163,151.025 h1.52
  text "Name" at 201.575,151.025 h1.52
  text "Material" at 225.191,151.025 h1.52
  text "Thickness" at 247.029,151.025 h1.52
  text "Constant" at 263.534,151.025 h1.52
  text "Board Layer Stack" at 278.009,151.025 h1.52
  text "1" at 191.163,147.977 h1.52
  text "Top Paste" at 201.575,147.977 h1.52
  text "2" at 191.163,144.929 h1.52
  text "Top Overlay" at 201.575,144.929 h1.52
  text "3" at 191.163,141.881 h1.52
  text "Top Solder" at 201.575,141.881 h1.52
  text "Solder Resist" at 225.191,141.881 h1.52
  text "0.010mm" at 247.029,141.881 h1.52
  text "3.5" at 263.534,141.881 h1.52
  text "4" at 191.163,138.833 h1.52
  text "Top Layer" at 201.575,138.833 h1.52
  text "Copper" at 225.191,138.833 h1.52
  text "0.035mm" at 247.029,138.833 h1.52
  text "5" at 191.163,135.785 h1.52
  text "Dielectric 1" at 201.575,135.785 h1.52
  text "7628MR" at 225.191,135.785 h1.52
  text "0.360mm" at 247.029,135.785 h1.52
  text "4.6" at 263.534,135.785 h1.52
  text "6" at 191.163,132.737 h1.52
  text "Power Layer" at 201.575,132.737 h1.52
  text "Copper" at 225.191,132.737 h1.52
  text "0.018mm" at 247.029,132.737 h1.52
  text "7" at 191.163,129.689 h1.52
  text "Dielectric 2" at 201.575,129.689 h1.52
  text "FR+4" at 225.191,129.689 h1.52
  text "0.710mm" at 247.029,129.689 h1.52
  text "4.3" at 263.534,129.689 h1.52
  text "8" at 191.163,126.641 h1.52
  text "GND Layer" at 201.575,126.641 h1.52
  text "Copper" at 225.191,126.641 h1.52
  text "0.018mm" at 247.029,126.641 h1.52
  text "9" at 191.163,123.593 h1.52
  text "Dielectric 3" at 201.575,123.593 h1.52
  text "7628MR" at 225.191,123.593 h1.52
  text "0.360mm" at 247.029,123.593 h1.52
  text "4.6" at 263.534,123.593 h1.52
  text "10" at 191.163,120.545 h1.52
  text "Bottom Layer" at 201.575,120.545 h1.52
  text "Copper" at 225.191,120.545 h1.52
  text "0.035mm" at 247.029,120.545 h1.52
  text "11" at 191.163,117.497 h1.52
  text "Bottom Solder" at 201.575,117.497 h1.52
  text "Solder Resist" at 225.191,117.497 h1.52
  text "0.010mm" at 247.029,117.497 h1.52
  text "3.5" at 263.534,117.497 h1.52
  text "12" at 191.163,114.449 h1.52
  text "Bottom Overlay" at 201.575,114.449 h1.52
  text "13" at 191.163,111.401 h1.52
  text "Bottom Paste" at 201.575,111.401 h1.52
  text "Stackup optimized for production at Eurocircuits" at 190.075,107.9 h1.52
Outline:
  the board outline again, w0.2
Top Body:
  the board outline again, w0.2

## Text inside footprints (layer, text, board x,y; h text height)
J1: Top Courtyard "PCB Edge" at 128.99,118.964 h1 r270
J2: Mechanical 1 "J1" at 155.758,118.253 h0.76 r90